# Altium PCB Main.PcbDoc
Units mm, origin at the board's own origin, x right, y up, seen from the top; angles counter-clockwise.
Board outline 97 x 90 mm, 4 copper layers (Top Layer, Layer 2, Layer 3, Bottom Layer), stack 0.603 mm thick; 9 components, 40 nets, 115 pads, 5 vias.
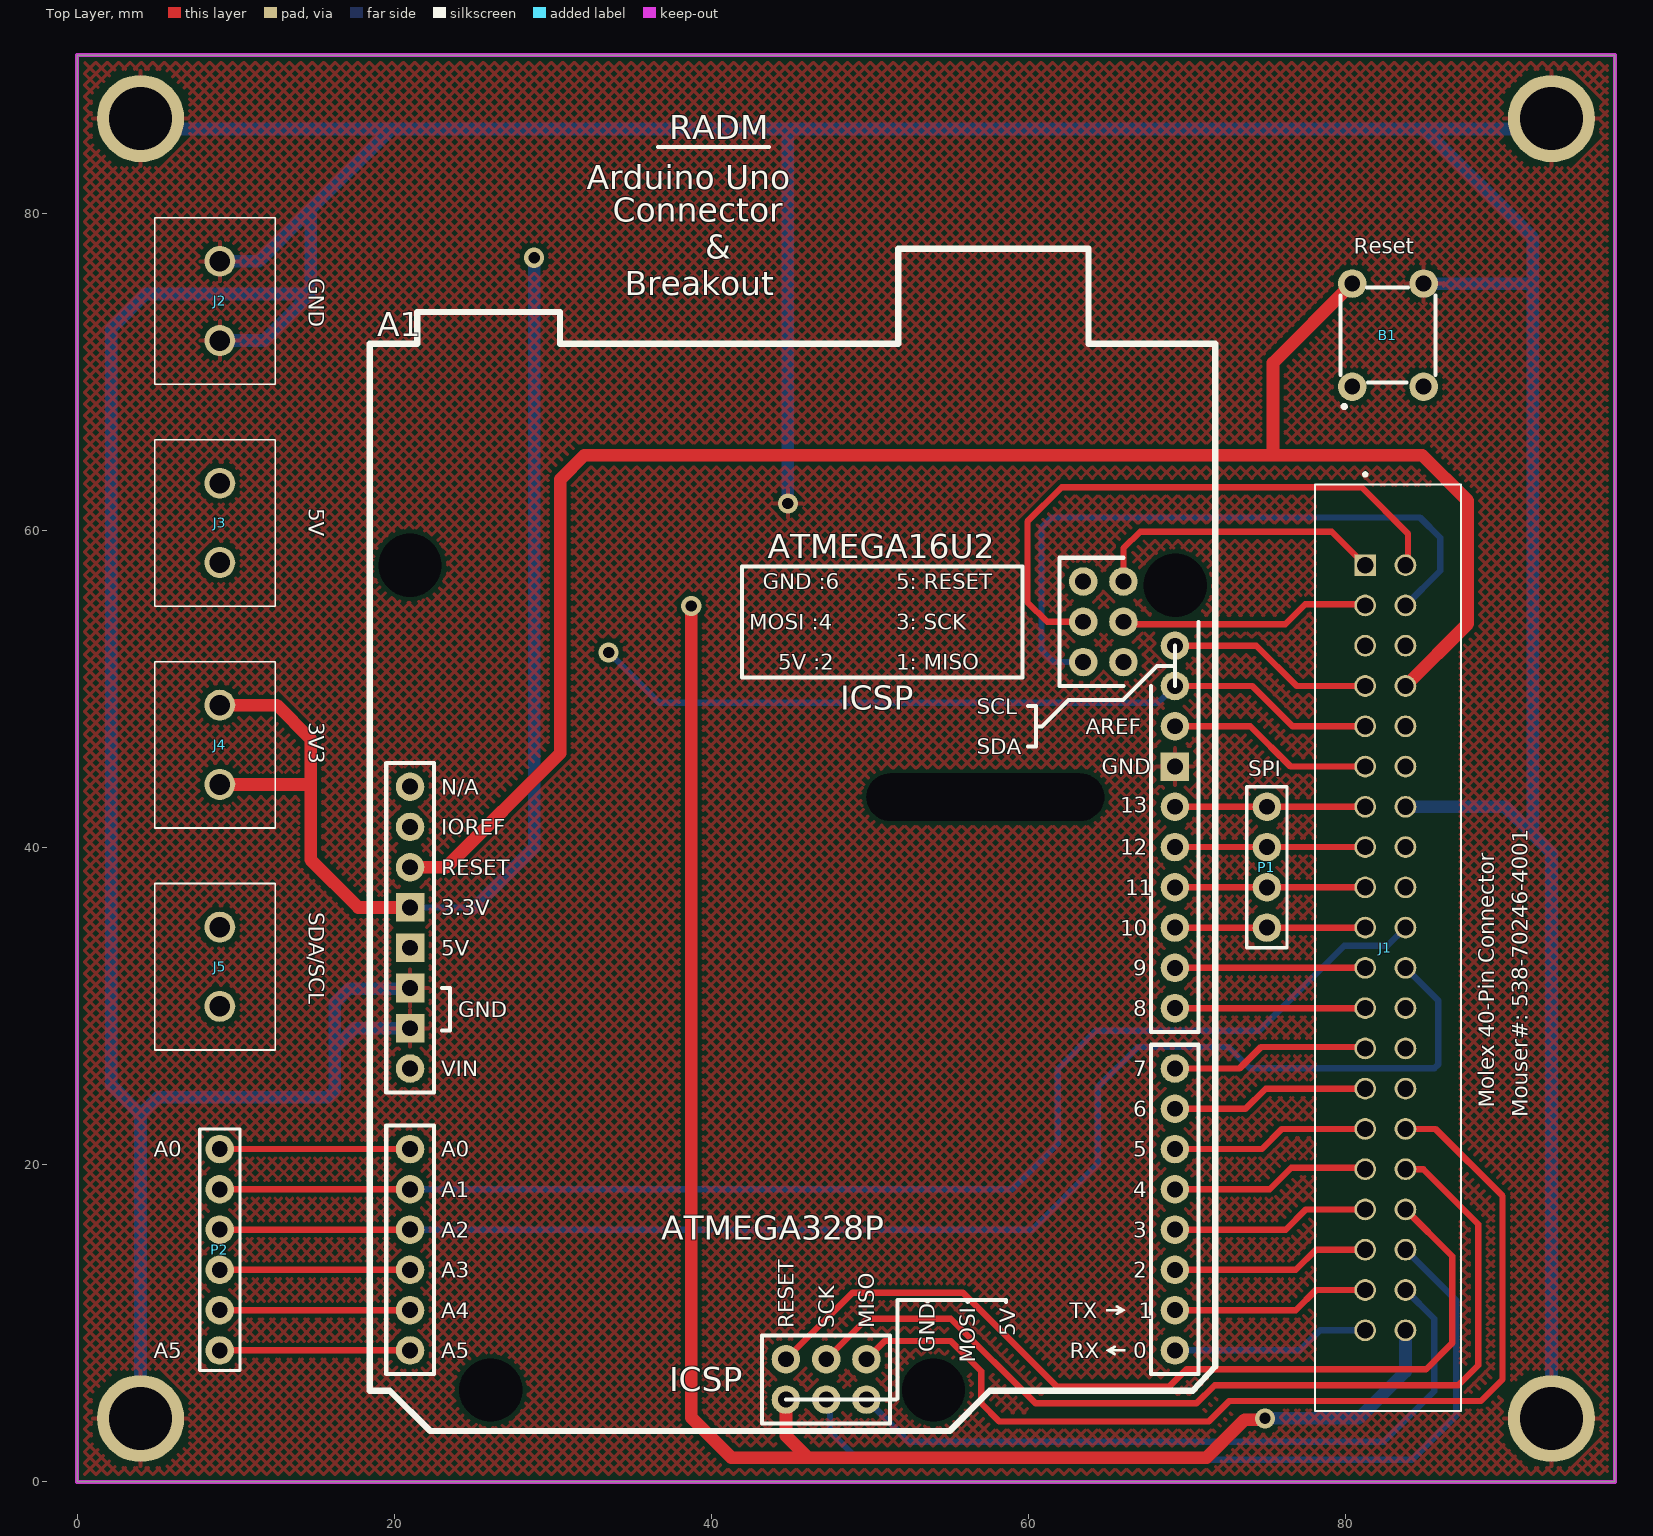
[diagram p0: Top Layer view]
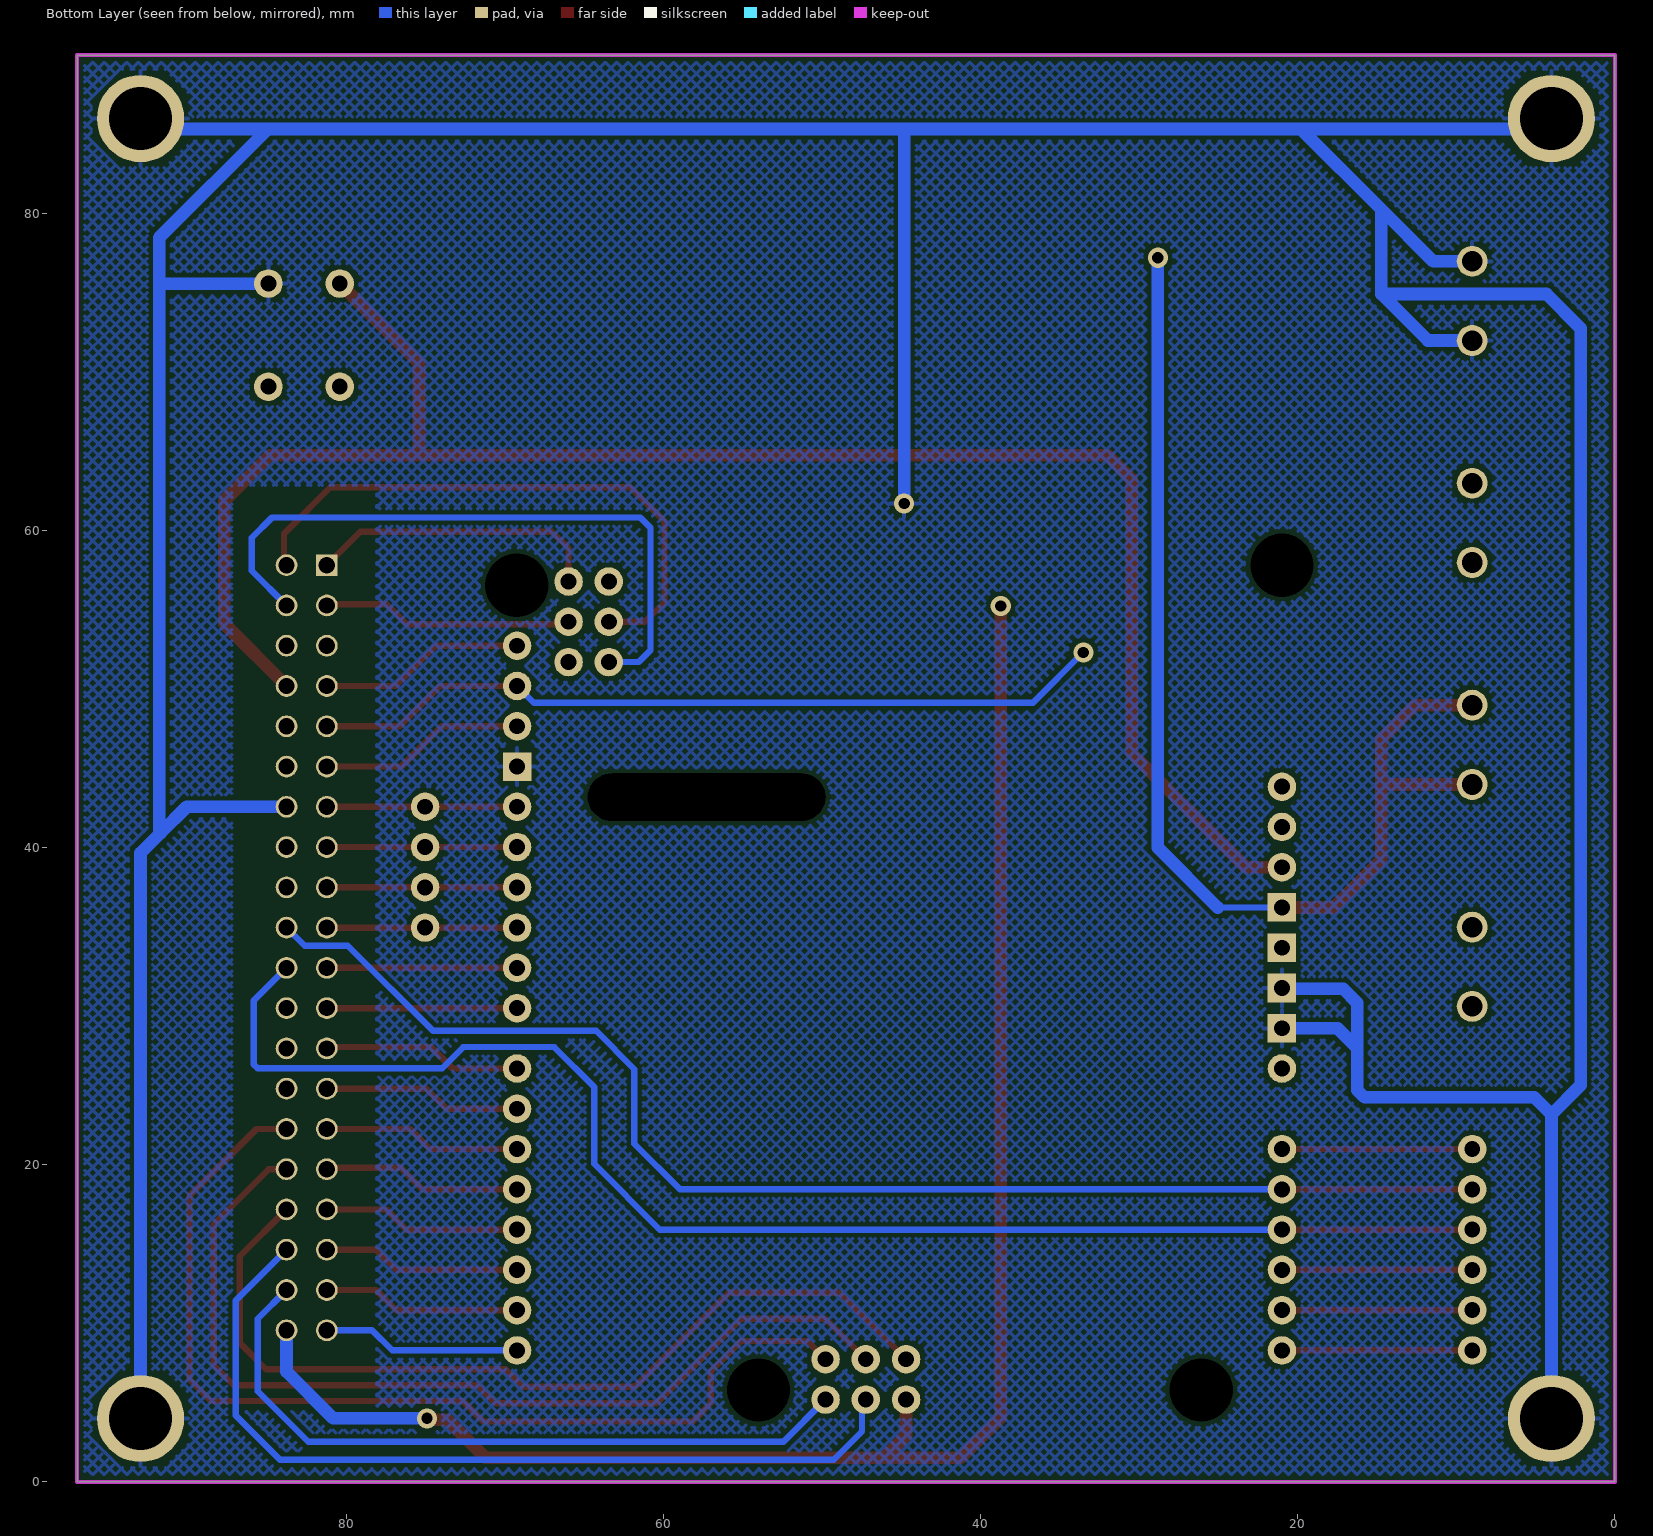
[diagram p1: Bottom Layer view, seen from below]
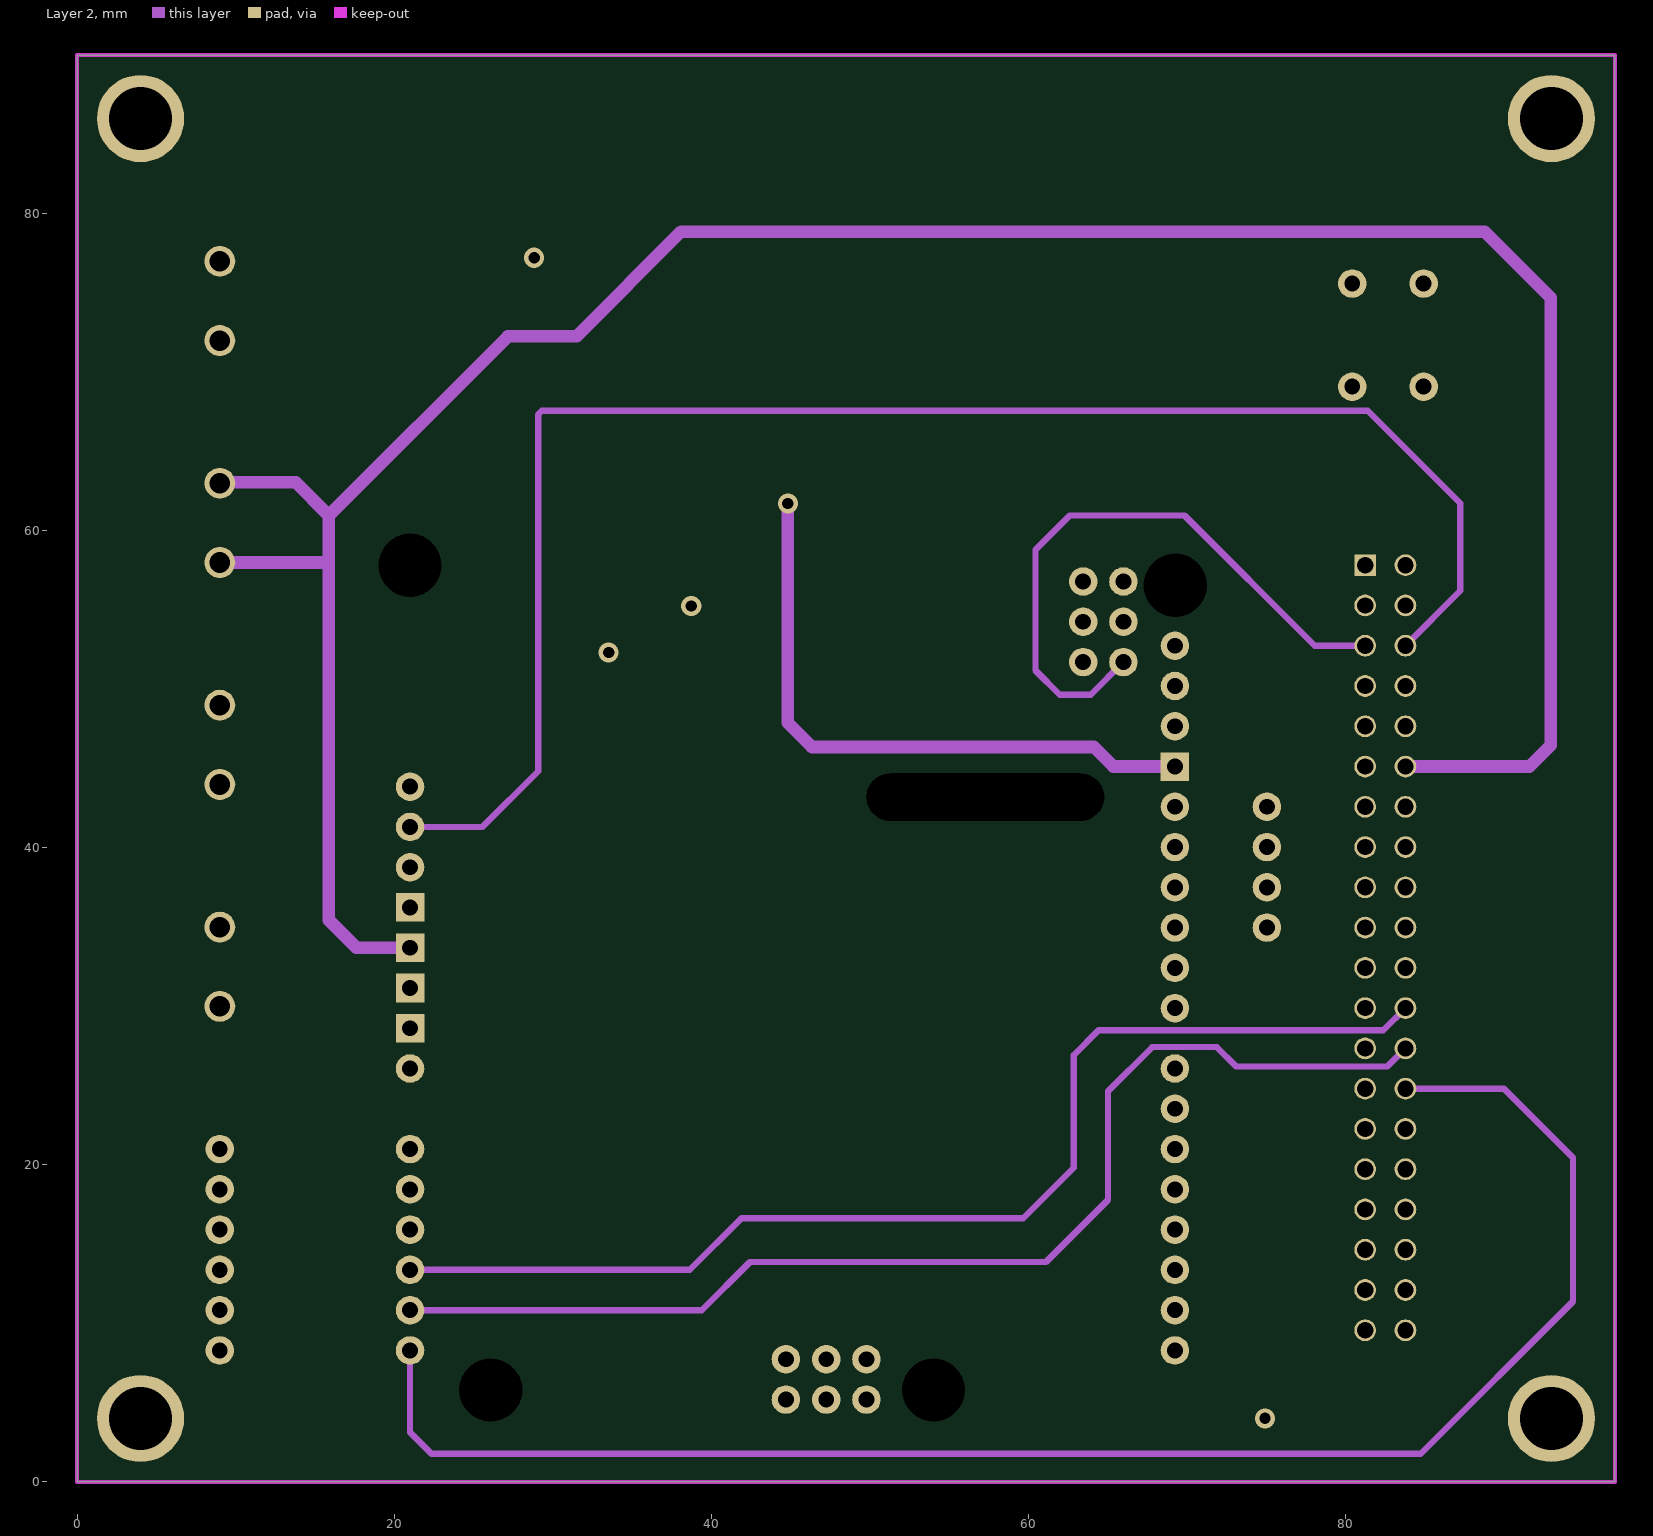
[diagram p2: Layer 2]
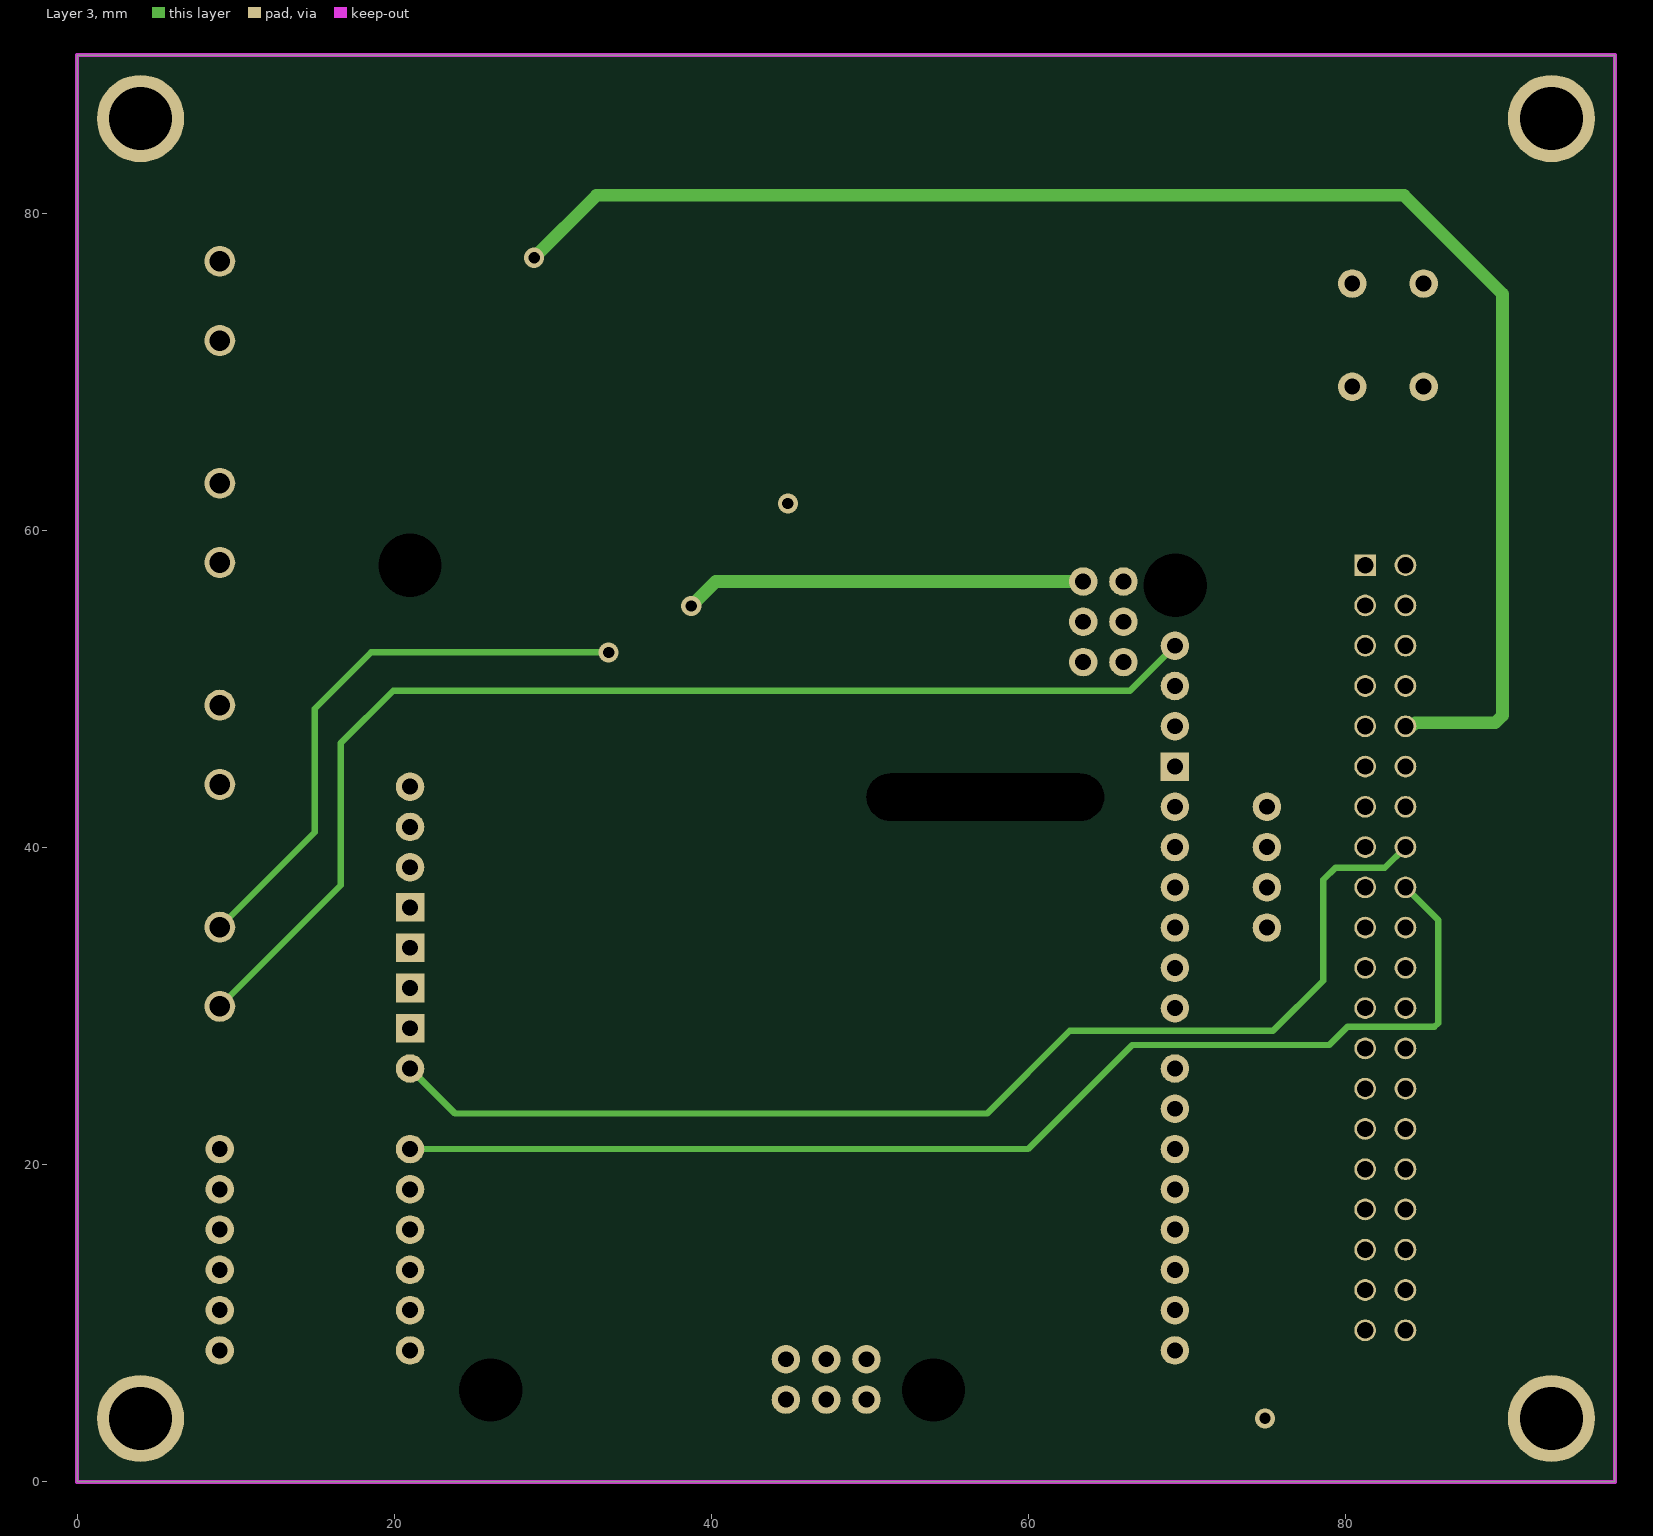
[diagram p3: Layer 3]

## Layer stack, top to bottom
Top Solder: solder mask 0.0102, Solder Resist, Dk 3.5
Top Layer: signal copper 0.0356
Dielectric 2: prepreg 0.0711, PP-006, Dk 4.1
Layer 2: signal copper 0.035
Dielectric 1: dielectric 0.32, FR-4, Dk 4.8
Layer 3: signal copper 0.035
Dielectric 3: prepreg 0.0711, PP-006, Dk 4.1
Bottom Layer: signal copper 0.0356
Bottom Solder: solder mask 0.0102, Solder Resist, Dk 3.5

## Board outline
0,0 0,90 97,90 97,0

## Design rules (kind name [scope] priority, off if disabled: settings)
Clearance [All] p1: gap=0.254 ignorepadtopadclearanceinfootprint=FALSE except(0: Arc-Hole Track-Hole SMDPad-Hole THPad-Hole Via-Hole Fill-Hole Poly-Hole Region-Hole Text-Hole)
PolygonConnect [All] p1: connectstyle=Relief reliefconductorwidth=0.254 reliefentries=4 polygonreliefangle="90 Angle" airgapwidth=0.254
RoutingVias [All] p1: holewidth=0.711 width=1.27 viastyle="Through Hole" minholewidth=0.711 minwidth=1.27 maxholewidth=0.711 maxwidth=1.27
SolderMaskExpansion [All] p1: expansion=0.102 istentingtop=FALSE
Width [All] p1: maxlimit=0.8 minlimit=0.4 preferedwidth=0.4
30 further rules are at their usual default settings.

## Components (designator, comment, footprint, x,y, rotation, side; value= is the part's Value field where it differs from the comment)
A1 "Arduino Uno" "Arduino Uno" 18.46,71.795 r0 top
B1 "Pushbutton" FSM4JH 82.685,72.338 r90 top
J1 "1-1761681-3" TE_1-1761681-3 81.25,57.825 r270 top
J2 "TB002-500-02BE" TB00250002BE 9,71.995 r90 top
J3 "TB002-500-02BE" TB00250002BE 9,57.995 r90 top
J4 "TB002-500-02BE" TB00250002BE 9,43.995 r90 top
J5 "TB002-500-02BE" TB00250002BE 9,29.995 r90 top
P1 "Header 4" HDR1X4 75.05,42.585 r270 top
P2 "Header 6" HDR1X6 9,20.995 r270 top

## Footprints (in the part's own frame and the unit in brackets; to place one, negate y for a bottom-side part, rotate by r counter-clockwise, add the part's x,y. Pads: shape width x height; smd on the part's side, far side on the other; paste and mask are expansions set on the pad)
"Arduino Uno" [mm]
  round 1.8 hole 1: 0(50.79,-63.5) 1(50.79,-60.96) 2(50.79,-58.42) 3(50.79,-55.88) 4(50.79,-53.34) 5(50.79,-50.8) 6(50.79,-48.26) 7(50.79,-45.72) 8(50.79,-41.91) 9(50.79,-39.37) 10(50.79,-36.83) 11(50.79,-34.29) 12(50.79,-31.75) 13(50.79,-29.21) 200(26.25,-66.6) 201(26.25,-64.06) 202(28.79,-66.6) 203(28.79,-64.06) 204(31.33,-66.6) 205(31.33,-64.06) 300(45,-15) 301(47.54,-15) 302(45,-17.54) 303(47.54,-17.54) 304(45,-20.08) 305(47.54,-20.08) A0(2.54,-50.8) A1(2.54,-53.34) A2(2.54,-55.88) A3(2.54,-58.42) A4(2.54,-60.96) A5(2.54,-63.5) AREF(50.79,-24.13) IOREF(2.54,-30.48) N/A(2.54,-27.94) RESET(2.54,-33.02) SCL(50.79,-19.05) SDA(50.79,-21.59) VIN(2.54,-45.72)
  rect 1.8x1.8 hole 1: 3V3(2.54,-35.56) 5V(2.54,-38.1) GND1(2.54,-40.64) GND2(2.54,-43.18) GND3(50.79,-26.67)
  round 1.524 hole 4 unplated: 211(2.54,-13.97) 211(7.62,-66) 211(35.56,-66) 211(50.8,-15.24)
  oval 14x1.524 hole 3 slot 15 at 0 deg unplated: LED(38.83,-28.6)
  silkscreen extent 0,-68.58 53.33,6
FSM4JH [mm]
  round 1.8 hole 1: 1(-3.25,2.25) 2(3.25,2.25) 3(-3.25,-2.25) 4(3.25,-2.25)
  silkscreen extent -4.6,-3 3,3, body extent -3.82,-3 3.98,3, height 7.61
HDR1X4 [mm] "Connector; Header; 4 Position"
  round 1.8 hole 1: 1(0,0) 2(2.54,0) 3(5.08,0) 4(7.62,0)
  silkscreen extent -1.27,-1.27 8.89,1.27
HDR1X6 [mm] "Connector; Header; 6 Position"
  round 1.8 hole 1: 1(0,0) 2(2.54,0) 3(5.08,0) 4(7.62,0) 5(10.16,0) 6(12.7,0)
  silkscreen extent -1.27,-1.27 13.97,1.27
TB00250002BE [mm]
  round 1.95 hole 1.3: 1(0,0) 2(5,0)
  silkscreen extent -2.75,-3.5 7.75,4.1, body extent -2.51,-4.08 7.99,3.52, height 9.99
TE_1-1761681-3 [mm]
  rect 1.37x1.37 hole 1.02: 1(0,0)
  round 1.37 hole 1.02: 2(0,2.54) 3(2.54,0) 4(2.54,2.54) 5(5.08,0) 6(5.08,2.54) 7(7.62,0) 8(7.62,2.54) 9(10.16,0) 10(10.16,2.54) 11(12.7,0) 12(12.7,2.54) 13(15.24,0) 14(15.24,2.54) 15(17.78,0) 16(17.78,2.54) 17(20.32,0) 18(20.32,2.54) 19(22.86,0) 20(22.86,2.54) 21(25.4,0) 22(25.4,2.54) 23(27.94,0) 24(27.94,2.54) 25(30.48,0) 26(30.48,2.54) 27(33.02,0) 28(33.02,2.54) 29(35.56,0) 30(35.56,2.54) 31(38.1,0) 32(38.1,2.54) 33(40.64,0) 34(40.64,2.54) 35(43.18,0) 36(43.18,2.54) 37(45.72,0) 38(45.72,2.54) 39(48.26,0) 40(48.26,2.54)
  silkscreen extent -5.83,-3.18 53.34,6.04

## Part data
B1: "Switch", Manufacturer_Name="TE Connectivity", Manufacturer_Part_Number=FSM2JAH, Mouser Part Number=506-FSM2JAH, Datasheet Link=http://www.te.com/commerce/DocumentDelivery/DDEController?Action=showdoc&DocId=Customer+Drawing%7F1825910%7FC9%7Fpdf%7FEnglish%7FENG_CD_1825910_C9.pdf%7F1825910-3, Mouser Price/Stock=https://www.mouser.co.uk/ProductDetail/TE-Connectivity-PB/FSM2JAH?qs=Of7OaoM7rsH02ckr%252BGLHNA%3D%3D
J1: "IDC LOW PRO HDR 50P VERT HT BLACK", Package=None, Availability=Unavailable, MP=1-1761681-3, Price=None
J2 J3 J4 J5: "Connector", Manufacturer_Name="CUI Devices", Mouser Part Number=490-TB002-500-02BE, Arrow Part Number=TB002-500-02BE, Arrow Price/Stock=https://www.arrow.com/en/products/tb002-500-02be/cui-devices?region=nac, Datasheet Link=https://eu.mouser.com/datasheet/2/670/tb002_500-1550579.pdf, Height=10.4mm, Manufacturer_Part_Number=TB002-500-02BE, Mouser Price/Stock=https://www.mouser.co.uk/ProductDetail/CUI-Devices/TB002-500-02BE?qs=vLWxofP3U2x9716kcgva%2Fw%3D%3D
P1: "Header, 4-Pin", LatestRevisionDate=17-Jul-2002, LatestRevisionNote="Re-released for DXP Platform.", Publisher="Altium Limited"
P2: "Header, 6-Pin", LatestRevisionDate=17-Jul-2002, LatestRevisionNote="Re-released for DXP Platform.", Publisher="Altium Limited"

## Free pads (board coordinates)
  round 5.5 hole 4: M(4,4) M(4,86) M(93,4) M(93,86)

## Via types
v1: diameter 1.27, hole 0.711, Top Layer to Bottom Layer, 5 vias

## Nets (pads, with @x,y where several pads share a name; then routed paths per layer and width w, separated by ;. In a path a pad name is that pad's centre, name@x,y a point inside that pad or via, vN(x,y) a via of type N, cw(c..) or ccw(c..) an arc to the next point about the centre after c; other vN are vias at no path point)
0: A1.0 J1.39 | length 12.5
  Bottom Layer w0.4: A1.0 77.129,8.295 78.399,9.565 J1.39
1: A1.1 J1.37 | length 12.5
  Top Layer w0.4: A1.1 76.875,10.835 78.145,12.105 J1.37
2: A1.2 J1.35 | length 12.5
  Top Layer w0.4: A1.2 76.875,13.375 78.145,14.645 J1.35
3: A1.3 J1.33 | length 12.5
  Top Layer w0.4: A1.3 76.24,15.915 77.51,17.185 J1.33
3V3: A1.3V3 J1.10 J4.1 J4.2 | length 172.4
  Top Layer w0.8: J4.1 14.732,43.995 ; J4.2 12.6,48.995 14.732,46.863 14.732,43.995 ; A1.3V3 17.74,36.235 14.732,39.243 14.732,43.995
  Layer 3 w0.8: v1(28.829,77.216) 32.766,81.153 83.693,81.153 89.916,74.93 89.916,48.348 89.447,47.879 84.407,47.879 84.302,47.774 83.899,47.774 J1.10
  Bottom Layer w0.4: A1.3V3 25.059,36.235
  Bottom Layer w0.8: 25.059,36.235 28.829,40.005 v1(28.829,77.216)
4: A1.4 J1.31 | length 12.6
  Top Layer w0.4: A1.4 75.224,18.455 76.581,19.812 81.163,19.812 J1.31
5: A1.5 J1.29 | length 12.5
  Top Layer w0.4: A1.5 74.716,20.995 75.986,22.265 J1.29
5V: A1.5V J1.12 J3.1 J3.2 | length 170.2
  Layer 2 w0.4: J3.2 J3.2@9.066,63.061 ; 15.831,57.995 15.875,58.039
  Layer 2 w0.8: J3.1 15.831,57.995 ; J3.2@9.066,63.061 13.774,63.061 15.875,60.96 ; A1.5V 17.613,33.695 15.875,35.433 15.875,58.039 15.875,60.96 ; J1.12 91.607,45.125 92.964,46.482 92.964,74.676 88.773,78.867 38.1,78.867 31.496,72.263 27.178,72.263 15.875,60.96
6: A1.6 J1.27 | length 12.5
  Top Layer w0.4: A1.6 73.7,23.535 74.97,24.805 J1.27
7: A1.7 J1.25 | length 12.6
  Top Layer w0.4: A1.7 73.319,26.075 74.676,27.432 81.163,27.432 J1.25
8: A1.8 J1.23 | length 12
  Top Layer w0.4: A1.8 J1.23
9: A1.9 J1.21 | length 12
  Top Layer w0.4: A1.9 J1.21
201: A1.201 J1.34 | length 57
  Top Layer w0.4: A1.201 48.913,11.938 55.88,11.938 61.81,6.008 68.878,6.008 69.982,7.112 85.09,7.112 86.741,8.763 86.741,14.234 J1.34
202: A1.202 J1.36 | length 55.3
  Bottom Layer w0.4: A1.202 47.486,4.959 47.486,3.187 49.276,1.397 84.201,1.397 86.995,4.191 86.995,11.44 J1.36
203: A1.203 J1.32 | length 60.3
  Top Layer w0.4: A1.203 49.802,10.287 55.118,10.287 60.452,4.953 70.612,4.953 71.755,6.096 87.122,6.096 88.392,7.366 88.392,16.256 84.923,19.725 J1.32
204: A1.204 J1.38 | length 45.4
  Bottom Layer w0.4: A1.204 52.445,2.54 82.423,2.54 85.598,5.715 85.598,10.297 J1.38
205: A1.205 J1.30 | length 64.4
  Top Layer w0.4: A1.205 50.945,8.89 55.118,8.89 57.023,6.985 57.023,4.953 58.166,3.81 71.374,3.81 72.663,5.099 88.538,5.099 89.916,6.477 89.916,18.034 85.685,22.265 J1.30
301: A1.301 J1.1 | length 18.7
  Top Layer w0.4: A1.301 66,58.888 67.056,59.944 79.131,59.944 J1.1
302: A1.302 J1.2 | length 37.3
  Top Layer w0.4: A1.302 61.188,54.255 59.944,55.499 59.944,60.579 62.103,62.738 81.026,62.738 83.947,59.817 83.947,57.982 J1.2
303: A1.303 J1.3 | length 15.9
  Top Layer w0.4: A1.303 66.154,54.101 76.199,54.101 77.47,55.372 81.163,55.372 J1.3
304: A1.304 J1.4 | length 41.8
  Bottom Layer w0.4: A1.304 61.569,51.715 60.833,52.451 60.833,60.198 61.468,60.833 84.709,60.833 85.979,59.563 85.979,57.474 J1.4
305: A1.305 J1.5 | length 39.7
  Layer 2 w0.4: A1.305 63.942,49.657 61.976,49.657 60.452,51.181 60.452,58.801 62.611,60.96 69.85,60.96 78.065,52.745 J1.5
A0: A1.A0 J1.18 P2.1 | length 89.6
  Top Layer w0.4: P2.1 A1.A0
  Layer 3 w0.4: A1.A0 59.984,20.995 66.548,27.559 78.994,27.559 80.137,28.702 85.618,28.702 85.852,28.936 85.852,35.443 J1.18
A1: A1.A1 J1.20 P2.2 | length 84.4
  Top Layer w0.4: P2.2 A1.A1
  Bottom Layer w0.4: A1.A1 58.968,18.455 61.849,21.336 61.849,26.035 64.262,28.448 74.549,28.448 79.927,33.826 82.651,33.826 J1.20
A2: A1.A2 J1.22 P2.3 | length 92.1
  Top Layer w0.4: P2.3 A1.A2
  Bottom Layer w0.4: A1.A2 60.238,15.915 64.389,20.066 64.389,24.912 66.906,27.429 72.647,27.429 73.977,26.099 85.618,26.099 85.852,26.333 85.852,30.363 J1.22
A3: A1.A3 J1.24 P2.4 | length 85.8
  Top Layer w0.4: P2.4 A1.A3
  Layer 2 w0.4: A1.A3 38.648,13.375 41.91,16.637 59.69,16.637 62.865,19.812 62.865,26.924 64.425,28.484 82.389,28.484 J1.24
A4: A1.A4 J1.26 P2.5 | length 86.7
  Top Layer w0.4: P2.5 A1.A4
  Layer 2 w0.4: A1.A4 39.41,10.835 42.447,13.872 61.116,13.872 65.024,17.78 65.024,24.638 67.815,27.429 71.885,27.429 73.108,26.206 82.651,26.206 J1.26
A5: A1.A5 J1.28 P2.6 | length 116.5
  Top Layer w0.4: P2.6 A1.A5
  Layer 2 w0.4: A1.A5 21,3.13 22.352,1.778 84.759,1.778 94.361,11.38 94.361,20.447 90.003,24.805 J1.28
AREF: A1.AREF J1.11 | length 13.1
  Top Layer w0.4: A1.AREF 74.001,47.665 76.541,45.125 J1.11
GND: A1.GND1 A1.GND2 A1.GND3 B1.4 J1.14 J2.1 J2.2 pad.M | length 391
  Layer 2 w0.8: v1(44.831,61.722) 44.831,47.879 46.355,46.355 64.135,46.355 65.365,45.125 A1.GND3
  Bottom Layer w0.8: pad.M@4,4 4,23.177 ; pad.M@4,86 4.656,85.344 19.812,85.344 ; J2.1 11.797,71.995 14.732,74.93 ; J2.2 11.463,76.995 14.732,80.264 ; A1.GND2 17.486,28.615 16.256,27.385 ; A1.GND1 20.96,31.115 17.145,31.115 16.256,30.226 16.256,27.385 ; v1(44.831,61.722) 44.831,85.344 ; J1.14 90.083,42.585 91.734,40.934 ; B1.4 91.694,75.588 ; pad.M@93,4 93,39.668 91.734,40.934 ; pad.M@93,86 92.344,85.344 84.963,85.344 ; 4,23.177 2.159,25.018 2.159,72.771 4.318,74.93 14.732,74.93 ; 4,23.177 5.08,24.257 15.787,24.257 16.256,24.726 16.256,27.385 ; 14.732,74.93 14.732,80.264 ; 14.732,80.264 19.812,85.344 ; 19.812,85.344 44.831,85.344 ; 44.831,85.344 84.963,85.344 ; 84.963,85.344 91.821,78.486 91.821,41.021 91.734,40.934
"ICSP GND": A1.200 A1.300 J1.40 | length 131.8
  Top Layer w0.8: v1(38.735,55.245) 38.735,4.064 41.275,1.524 46.101,1.524 ; A1.200 44.71,2.915 46.101,1.524 ; v1(74.93,4.01) 74.84,3.92 73.643,3.92 71.247,1.524 46.101,1.524
  Layer 3 w0.8: v1(38.735,55.245) 40.285,56.795 A1.300
  Bottom Layer w0.8: v1(74.93,4.01) 80.845,4.01 83.79,6.955 J1.40
IOREF: A1.IOREF J1.6 | length 103.1
  Layer 2 w0.4: A1.IOREF 25.567,41.315 29.083,44.831 29.083,67.33 29.317,67.564 81.407,67.564 87.249,61.722 87.249,56.204 J1.6
MISO: A1.12 J1.15 P1.2 | length 12
  Top Layer w0.4: A1.12 J1.15
MOSI: A1.11 J1.17 P1.3 | length 12
  Top Layer w0.4: A1.11 J1.17
RESET: A1.RESET B1.2 J1.8 | length 115
  Top Layer w0.8: A1.RESET 23.281,38.775 30.48,45.974 30.48,63.246 32.004,64.77 75.438,64.77 ; B1.2 75.438,70.591 75.438,64.77 ; J1.8 87.718,54.133 87.718,61.888 84.836,64.77 75.438,64.77
SCK: A1.13 J1.13 P1.1 | length 12
  Top Layer w0.4: A1.13 J1.13
SCL: A1.SCL J1.7 J5.1 | length 88
  Top Layer w0.4: A1.SCL 74.382,52.745 76.922,50.205 J1.7
  Layer 3 w0.4: J5.1 16.637,37.632 16.637,46.609 19.939,49.911 66.416,49.911 A1.SCL
SDA: A1.SDA J1.9 J5.2 | length 86.8
  Top Layer w0.4: A1.SDA 74.128,50.205 76.668,47.665 J1.9
  Layer 3 w0.4: J5.2 14.986,40.981 14.986,48.768 18.542,52.324 v1(33.528,52.324)
  Bottom Layer w0.4: v1(33.528,52.324) 36.703,49.149 68.185,49.149 69.241,50.205 A1.SDA
SS: A1.10 J1.19 P1.4 | length 11.8
  Top Layer w0.4: A1.10 P1.4 ; P1.4@75.25,34.965 J1.19
VIN: A1.VIN J1.16 | length 74.6
  Layer 3 w0.4: A1.VIN 23.834,23.241 57.404,23.241 62.611,28.448 75.438,28.448 78.613,31.623 78.613,37.973 79.375,38.735 82.48,38.735 J1.16
pads on no net: A1.211 A1.LED A1.N/A B1.1 B1.3

## Polygon pours and split planes (outlines as drawn)
GND on Bottom Layer "GND_L04_P000" (hatched 45Degree grid 0.508 track 0.203, pour order 0): 0,90 97,90 97,0 0,0
GND on Top Layer "GND_L01_P001" (hatched 45Degree grid 0.508 track 0.203, pour order 1): 0,0 0,90 97,90 97,0

## Keep-outs
Keep-Out Layer:
  the board outline again, w0.254

## Other copper
Top Layer:
  pour cut-out: 78.105,62.865 87.249,62.865 87.249,4.445 78.105,4.445
Bottom Layer:
  pour cut-out: 78.105,4.445 87.249,4.445 87.249,62.865 78.105,62.865

## Silkscreen, mask and mechanical layers (free items; w line width, h text height)
Top Overlay:
  lines w0.254: 36.636,84.215 43.636,84.215
  text "RADM" at 37.343,84.703 h1.52
  text "Arduino Uno" at 32.138,81.536 h1.52
  text "Connector" at 33.788,79.478 h1.52
  text "Reset" at 80.519,77.478 h1
  text "&" at 39.628,77.165 h1.52
  text "GND" at 14.603,75.923 h1 r270
  text "Breakout" at 34.55,74.853 h1.52
  text "5V" at 14.603,61.423 h1 r270
  text "3V3" at 14.603,47.923 h1 r270
  text "SPI" at 73.884,44.5 h1
  text "SDA/SCL" at 14.603,35.922 h1 r270
  text "Molex 40-Pin Connector" at 89.391,23.592 h1 r90
  text "Mouser#: 538-70246-4001" at 91.491,23.008 h1 r90
  text "A0" at 4.834,20.495 h1
  text "A5" at 4.834,7.795 h1

## Text inside footprints (layer, text, board x,y; h text height)
A1: Top Overlay "GND" at 54.1,8.19 h1 r90; Top Overlay "MOSI" at 56.64,7.523 h1 r90; Top Overlay "5V" at 59.18,9.189 h1 r90; Top Overlay "RESET" at 45.21,9.695 h1 r90; Top Overlay "SCK" at 47.75,9.695 h1 r90; Top Overlay "MISO" at 50.29,9.695 h1 r90; Top Overlay "ICSP" at 37.364,5.703 h1.52; Top Overlay "ATMEGA328P" at 36.836,15.28 h1.52; Top Overlay "RX" at 62.624,7.795 h1; Top Overlay "TX" at 62.624,10.335 h1; Top Overlay "7" at 66.624,25.575 h1; Top Overlay "6" at 66.624,23.035 h1; Top Overlay "5" at 66.624,20.495 h1; Top Overlay "4" at 66.624,17.955 h1; Top Overlay "3" at 66.624,15.415 h1; Top Overlay "2" at 66.624,12.875 h1; Top Overlay "1" at 66.957,10.335 h1; Top Overlay "0" at 66.624,7.795 h1; Top Overlay "SDA" at 56.751,45.895 h1; Top Overlay "SCL" at 56.751,48.435 h1; Top Overlay "N/A" at 22.96,43.355 h1; Top Overlay "IOREF" at 22.96,40.815 h1; Top Overlay "RESET" at 22.96,38.275 h1; Top Overlay "3.3V" at 22.96,35.735 h1; Top Overlay "5V" at 22.96,33.195 h1; Top Overlay "VIN" at 22.96,25.575 h1; Top Overlay "A0" at 22.96,20.495 h1; Top Overlay "A2" at 22.96,15.415 h1; Top Overlay "A3" at 22.96,12.875 h1; Top Overlay "A4" at 22.96,10.335 h1; Top Overlay "A5" at 22.96,7.795 h1; Top Overlay "GND" at 24.03,29.325 h1; Top Overlay "ICSP" at 48.127,48.717 h1.52; Top Overlay "ATMEGA16U2" at 43.557,58.269 h1.52; Top Overlay "GND :6" at 43.242,56.295 h1; Top Overlay "5: RESET" at 51.68,56.295 h1; Top Overlay "MOSI :4" at 42.409,53.755 h1; Top Overlay "3: SCK" at 51.68,53.755 h1; Top Overlay "5V :2" at 44.241,51.215 h1; Top Overlay "1: MISO" at 51.68,51.215 h1; Top Overlay "8" at 66.624,29.385 h1; Top Overlay "9" at 66.624,31.925 h1; Top Overlay "10" at 65.79,34.465 h1; Top Overlay "11" at 66.124,37.005 h1; Top Overlay "12" at 65.79,39.545 h1; Top Overlay "13" at 65.79,42.212 h1; Top Overlay "GND" at 64.624,44.625 h1; Top Overlay "AREF" at 63.625,47.165 h1